# Altium PCB print1.PcbDoc
Units mil, origin at the board's own origin, x right, y up, seen from the top; angles counter-clockwise.
Board outline 2840 x 2960 mil, 2 copper layers (Top Layer, Bottom Layer); 50 components, 40 nets, 154 pads, 55 vias.
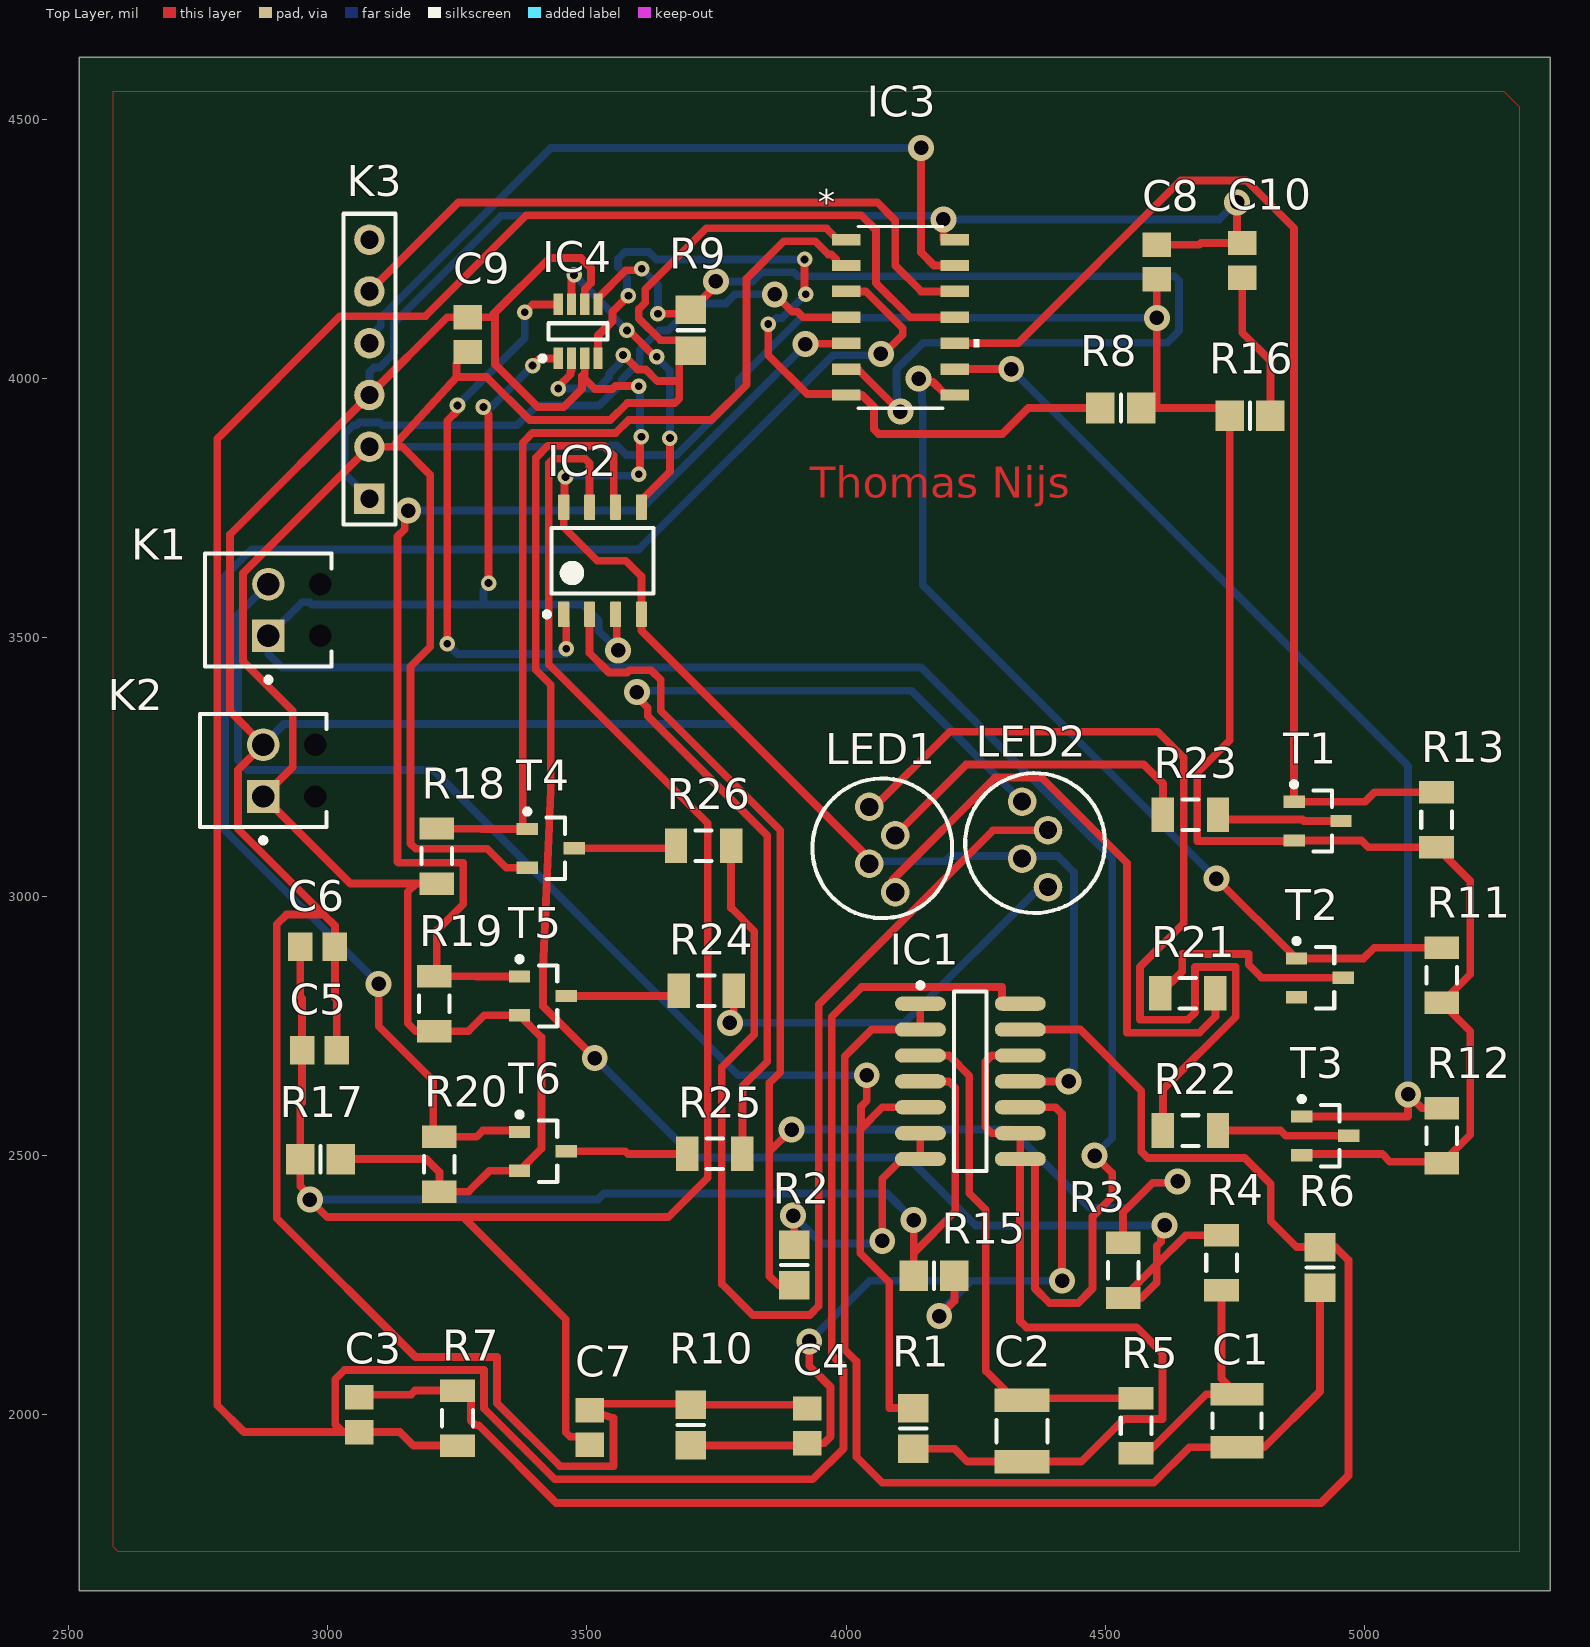
[diagram p0: Top Layer view]
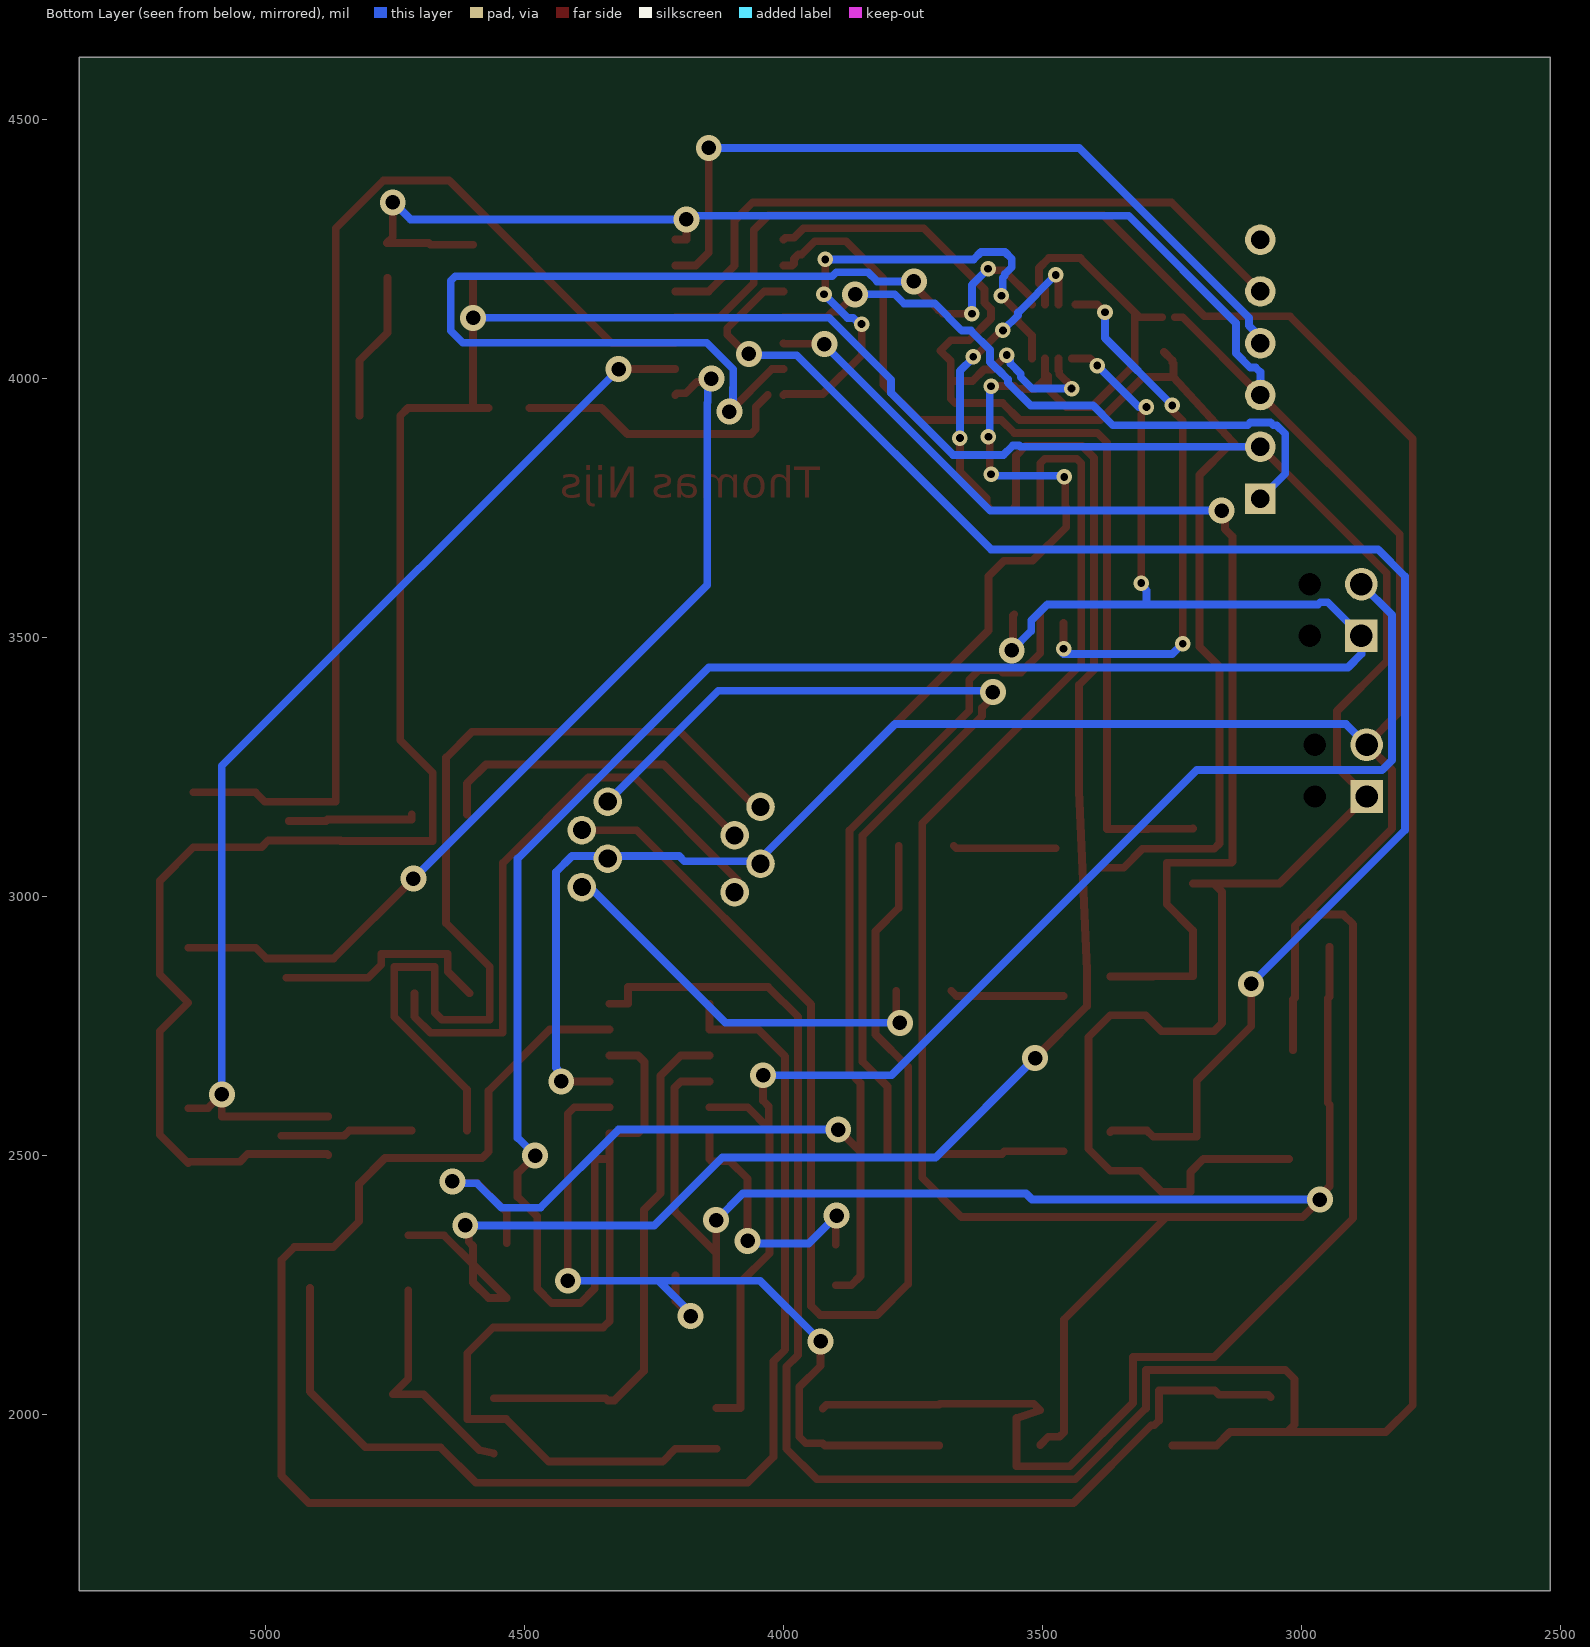
[diagram p1: Bottom Layer view, seen from below]

## Layer stack, top to bottom
Top Solder: solder mask 0.4, Solder Resist, Dk 3.5
Top Layer: signal copper 1.4
Dielectric 1: dielectric 12.6, FR-4, Dk 4.8
Bottom Layer: signal copper 1.4
Bottom Solder: solder mask 0.4, Solder Resist, Dk 3.5

## Board outline
2520,1660 5360,1660 5360,4620 2520,4620

## Design rules (kind name [scope] priority, off if disabled: settings)
Clearance [All] p1: gap=7 ignorepadtopadclearanceinfootprint=FALSE
PolygonConnect [All] p1: connectstyle=Relief reliefconductorwidth=10 reliefentries=4 polygonreliefangle="90 Angle" airgapwidth=10
RoutingVias [All] p1: holewidth=28 width=50 viastyle="Through Hole" minholewidth=28 minwidth=50 maxholewidth=28 maxwidth=50
SolderMaskExpansion [All] p1: expansion=4 istentingtop=FALSE
Width [All] p1: maxlimit=15 minlimit=15 preferedwidth=15 minimp=50.000000 maximp=50.000000 favimp=50.000000
30 further rules are at their usual default settings.

## Classes and differential pairs
component class part2: C1 C2 C3 C4 C5 C6 C7 IC1 IC2 K1 K2 R1 R2 R3 R4 R5 R6 R7 R10 R15 R17
component class part1: C8 C9 C10 IC3 IC4 K3 LED1 LED2 R8 R9 R11 R12 R13 R16 R18 R19 R20 R21 R22 R23 R24 R25 R26 T1 T2 T3 T4 T5 T6

## Components (designator, comment, footprint, x,y, rotation, side; value= is the part's Value field where it differs from the comment)
C1 "1210 10 µF" CAPC3225X279X50LL20T25 4755,1988.15 r270 top
C2 "3.3µF" CAPC1210(3225)280_N 4340,1968.15 r270 top
C3 "150 nF" CAPC2013X70X45NL10T25 3060,1999.69 r90 top
C4 "1 µF" CAPC2013X70X45NL10T25 3925,1978.15 r270 top
C5 "1 µF" CAPC2013X70X45NL10T25 2983.46,2703.15 r180 top
C6 "100 nF" CAPC2013X70X45NL10T25 2980,2903.15 r180 top
C7 "100 nF" CAPC2013X70X45NL10T25 3505,1974.69 r270 top
C8 "100 nF" CAPC2013X70X45NL10T25 4600,4224.69 r270 top
C9 "100 n f" CAPC2013X70X45NL10T25 3270,4084.69 r270 top
C10 "100 nF" CAPC2013X70X45NL10T25 4765,4228.15 r90 top
IC1 "MCP6004-E/SL" SOIC-SL14_M 4240,2643.15 r0 top
IC2 "TLC271ID" D0008A_L 3530,3648.15 r90 top
IC3 "PIC16LF15325-I/SL" SOIC14_SL_MCH 4105,4118.15 r0 top
IC4 "CAT5171TBI-50GT3" ONSC-SOT23-8-527AK-01_N 3482.8,4090.98 r90 top
K1 "1725656" PHOE-1725656-2 2885,3553.15 r90 top
K2 "1725656" PHOE-1725656-2 2875,3243.15 r90 top
K3 "Header 6" HDR1X6 3080,3768.15 r90 top
LED1 "L-154A4SUREQBFZGEW" L-154A4SUREQBFZGEC 4070,3093.15 r0 top
LED2 "L-154A4SUREQBFZGEW" L-154A4SUREQBFZGEC 4365,3103.15 r0 top
R1 "" 6-0805_M 4130,1973.15 r270 top value=15M
R2 "" 6-0805_M 3900,2288.78 r270 top value=10K
R3 "" C1206 4535,2278.15 r270 top value=330K
R4 "" C1206 4725,2293.15 r270 top value=15K
R5 "" C1206 4560,1978.15 r90 top value=15K
R6 "" 6-0805_M 4915,2283.78 r90 top value=10K
R7 "" C1206 3250,1993.15 r270 top value=470K
R8 "" 6-0805_M 4530.63,3943.15 r180 top value=10K
R9 "" 6-0805_M 3700,4093.15 r90 top value=10K
R10 "" 6-0805_M 3700,1979.69 r270 top value=10K
R11 "" C1206 5150,2848.15 r270 top value=470K
R12 "" C1206 5150,2538.15 r270 top value=470K
R13 "" C1206 5140,3148.15 r270 top value=470K
R15 "" 6-0805_M 4170,2268.15 r0 top value=10K
R16 "" 6-0805_M 4780,3928.15 r0 top value=10K
R17 "" 6-0805_M 2985.63,2493.15 r180 top value=10
R18 "" C1206 3210,3078.15 r270 top value=470K
R19 "" C1206 3205,2793.15 r270 top value=470K
R20 "" C1206 3215,2483.15 r270 top value=470K
R21 "" C1206 4660,2813.15 r0 top value=220
R22 "" C1206 4665,2548.15 r180 top value=220
R23 "" C1206 4665,3158.15 r180 top value=220
R24 "" C1206 3730,2818.15 r180 top value=220K
R25 "" C1206 3746.85,2503.15 r180 top value=220K
R26 "" C1206 3725,3098.15 r180 top value=220K
T1 "BSS84P" INF-PG-SOT23_N 4910.28,3145.75 r0 top
T2 "BSS84P" INF-PG-SOT23_N 4915,2843.15 r0 top
T3 "BSS84P" INF-PG-SOT23_N 4925,2538.15 r0 top
T4 "BSS84P" INF-PG-SOT23_N 3430,3093.15 r0 top
T5 "BSS84P" INF-PG-SOT23_N 3415,2808.15 r0 top
T6 "BSS84P" INF-PG-SOT23_N 3415,2508.15 r0 top

## Footprints (in the part's own frame and the unit in brackets; to place one, negate y for a bottom-side part, rotate by r counter-clockwise, add the part's x,y. Pads: shape width x height; smd on the part's side, far side on the other; paste and mask are expansions set on the pad)
6-0805_M [mm] "Chip Resistor, Body 2.0x1.2mm, IPC Low Density"
  rect 1.4x1.5 smd: 1(-1,0) 2(1,0)
  silkscreen extent 0,-0.65 0,0.65, body extent -1.07,-0.7 1.07,0.7, height 0.7
C1206 [mm] "Chip Capacitor, Body 3.2x1.6mm, IPC High Density"
  rect 1.1x1.7 smd: 1(-1.35,0) 2(1.35,0)
  silkscreen extent -0.4,-0.75 0.4,0.75, body extent -1.7,-0.9 1.7,0.9, height 1.3
CAPC1210(3225)280_N [mm] "Chip Capacitor, Body 3.2x2.5mm, Height 2.8mm, IPC Medium Density"
  rect 1.15x2.7 smd: 1(-1.5,0) 2(1.5,0)
  silkscreen extent -0.55,-1.25 0.55,1.25, body extent -1.7,-1.4 1.7,1.4, height 2.8
CAPC2013X70X45NL10T25 [mm] "Chip Capacitor, 2-Leads, Body 2.00x1.25mm, IPC Medium Density"
  rect 1.2x1.4 smd: 1(-0.85,0) 2(0.85,0)
  body extent -1.05,-0.67 1.05,0.67, height 0.7
CAPC3225X279X50LL20T25 [mm] "Chip Capacitor, 2-Leads, Body 3.40x2.70mm, IPC High Density"
  rect 1.1x2.6 smd: 1(-1.3,0) 2(1.3,0)
  silkscreen extent -0.35,-1.2 0.35,1.2, body extent -1.7,-1.35 1.7,1.35, height 2.79
D0008A_L [mm] "SOIC, 8-Leads, Body 5x4mm, Pitch 1.27mm, IPC High Density"
  rrect18% 1.25x0.55 smd: 1(-2.625,1.905) 2(-2.625,0.635) 3(-2.625,-0.635) 4(-2.625,-1.905) 5(2.625,-1.905) 6(2.625,-0.635) 7(2.625,0.635) 8(2.625,1.905)
  silkscreen extent -2.75,-2.5 1.6,2.85, body extent -3,-2.45 3,2.45, height 1.63
HDR1X6 [mm] "Connector; Header; 6 Position"
  rect 1.5x1.5 hole 0.9: 1(0,0)
  round 1.5 hole 0.9: 2(2.54,0) 3(5.08,0) 4(7.62,0) 5(10.16,0) 6(12.7,0)
  silkscreen extent -1.27,-1.27 13.97,1.27
INF-PG-SOT23_N [mm] "SOT23, 3-Leads, Body 2.9x1.3mm, Pitch 0.95mm, IPC Medium Density"
  rect 1.05x0.6 smd: 1(-1.15,0.95) 2(-1.15,-0.95) 3(1.15,0)
  silkscreen extent -1.27,-1.5 0.7,1.92, body extent -0.7,-1.5 0.7,1.5, height 1.1
L-154A4SUREQBFZGEC [mm]
  round 1.4 hole 0.889: 1(0.635,-2.159) 2(-0.635,-0.762) 3(0.635,0.635) 4(-0.635,2.032)
  silkscreen extent -3.43,-3.43 3.43,3.43
ONSC-SOT23-8-527AK-01_N [mm] "SOT23, 8-Leads, Body 2.9x1.6mm, Pitch 0.65mm, IPC Medium Density"
  rect 1.05x0.45 smd: 1(-1.325,0.975) 2(-1.325,0.325) 3(-1.325,-0.325) 4(-1.325,-0.975) 5(1.325,-0.975) 6(1.325,-0.325) 7(1.325,0.325) 8(1.325,0.975)
  silkscreen extent -1.45,-1.45 0.4,1.87, body extent -0.8,-1.45 0.8,1.45, height 1.45
PHOE-1725656-2 [mm] "Connector, 2-Leads, Body 6.2x5.4mm, Pitch 2.54mm"
  rect 1.6x1.6 hole 1.1: 1(-1.27,0)
  round 1.6 hole 1.1: 2(1.27,0)
  round 0 hole 1.1 unplated: MH1(-1.27,-2.54) MH2(1.27,-2.54)
  silkscreen extent -3.54,-3.1 2.77,3.1, body extent -2.77,-3.1 2.77,3.1, height 9
SOIC14_SL_MCH [mil]
  rect 55x22 smd paste+0 mask+0: 1(-104.5,150) 2(-104.5,100) 3(-104.5,50) 4(-104.5,0) 5(-104.5,-50) 6(-104.5,-100) 7(-104.5,-150) 8(104.5,-150) 9(104.5,-100) 10(104.5,-50) 11(104.5,0) 12(104.5,50) 13(104.5,100) 14(104.5,150)
  silkscreen extent -82,-175 152,176, body extent -118,-171 118,171, height 69
SOIC-SL14_M [mm] "SOIC, 14-Leads, Body 8.7x3.9mm, Pitch 1.27mm, IPC Low Density"
  oval 2.5x0.7 smd: 1(-2.45,3.81) 2(-2.45,2.54) 3(-2.45,1.27) 4(-2.45,0) 5(-2.45,-1.27) 6(-2.45,-2.54) 7(-2.45,-3.81) 8(2.45,-3.81) 9(2.45,-2.54) 10(2.45,-1.27) 11(2.45,0) 12(2.45,1.27) 13(2.45,2.54) 14(2.45,3.81)
  silkscreen extent -2.57,-4.4 0.8,4.83, body extent -2,-4.38 2,4.38, height 1.75

## Part data
C1: library part CMP-2000-05477-1, "Chip Capacitor, 10 uF, +/- 10%, 25 V, -55 to 85 degC, 1210 (3225 Metric), RoHS, Tape and Reel", Capacitance=10µF, Manufacturer=AVX, Operating Temperature=-55°C~85°C, Package / Case=1210(3225Metric), Package Description="2-Pin Surface Mount Device, Body 3.2 x 2.5 mm", Package Reference=1210, Ratings=-, Standard Package=1, Temperature Coefficient=X5R, Tolerance=±10%, Voltage - Rated=25V, Applications=GeneralPurpose, Catalog Drawings=AT2A_1210_2.79, Category=Capacitors, Datasheet URL=http://datasheets.avx.com/cx5r.pdf, Datasheet Version=05/2016, Family=CeramicCapacitors, Features=-, Height - Seated (Max)=-, Lead Spacing=-, Lead Style=-, Manufacturer URL=http://www.avx.com/, Mounting Technology=SurfaceMount, Mounting Type=SurfaceMount,MLCC, Online Catalog=X5RDielectric(D), Other Names=478-1627-6, Packaging=Digi-Reel®, Product Training Modules=ComponentSolutionsforSmartMeterApplications, Series=-, Size / Dimension="0.126\"Lx0.098\"W(3.20mmx2.50mm)", Thickness (Max)="0.110\"(2.79mm)"
C2: library part CMP-1038-02104-1, "CAP 2.2uF 100V ±10% 1210 (3225 Metric) Thickness 2.8mm SMD", Case-EIA=1210, Case-Metric=3225, Rated Voltage="100 V", Tolerance=Â±10%, Max Thickness="2.8 mm", Technology=SMT
C3 C4 C5 C6 C7 C8 C9 C10: library part CMP-2007-00889-1, Manufacturer=Murata, Part Number=GRM2165C1H332JA01D
IC1: library part CMP-0187-00279-2, "1 MHz, Low-Power Operational Amplifier, 14-Pin SOIC, Extended Temperature", Code_IPC=SOIC127P600-14, Code_JEDEC=MS-012-AB, ComponentLink1Description="Manufacturer URL", ComponentLink1URL=http://www.microchip.com/, ComponentLink2Description=Datasheet, ComponentLink2URL=http://ww1.microchip.com/downloads/en/DeviceDoc/21733j.pdf, ComponentLink3Description="Package Specification", ComponentLink3URL=http://www.microchip.com/stellent/groups/techpub_sg/documents/packagingspec/en012702.pdf, DatasheetVersion="revJ, Nov-2009", PackageDescription="14-Lead Plastic Small Outline (SL) - Narrow, 3.90mm Body [SOIC]", PackageReference=SOIC-SL14, PackageVersion="revBB, Aug-2009", RevisionNote="URLs added."
IC2: library part CMP-0017-00249-2, "LinCMOS(TM) Programmable Low-Power Operational Amplifier, 4 to 16 V, -40 to 85 degC, 8-pin SOIC (D8), Green (RoHS & no Sb/Br)", Manufacturer="Texas Instruments", Rating=Military, Total Supply Voltage(Max)(+5V is 5, +/-5V is 10)=16, Total Supply Voltage(Min)(+5V is 5, +/-5V is 10)=4, CMRR(Min)(dB)=65, Code_JEDEC=MS-012, ComponentLink1Description="Manufacturer URL", ComponentLink1URL=http://www.ti.com/, ComponentLink2Description=Datasheet, ComponentLink2URL=http://www.ti.com/lit/ds/symlink/tlc271.pdf, ComponentLink3Description="Package Specification", ComponentLink3URL=http://www.ti.com/litv/pdf/msoi002j, DatasheetVersion=SLOS090D, Eco-Plan="Green (RoHS & no Sb/Br)", GBW(Typ)(MHz)=1.7, IIB(Max)(pA)=60, Iq per channel(Max)(mA)=1.6, Mounting Technology="Surface Mount", Number of Channels=1, Offset Drift(Typ)(uV/C)=1.8, PackageDescription="8-Pin Plastic Small Outline, Body 4.9 x 3.9 mm, Pitch 1.27 mm", PackageReference=D0008A, PackageVersion="4040047-3/M, 06/2011", PartNumber=TLC271ID, Slew Rate(Typ)(V/us)=3.6, Sub Family="General Purpose Amplifier", Vio (25C)(Max)(mV)=10, Vn at 1kHz(Typ)(nV/rtHz)=25
IC3: "No Description Available", Built_By=EMA_Cory, Copyright="Copyright (C) 2018 Accelerated Designs. All rights reserved", Datasheet=http://ww1.microchip.com/downloads/en/DeviceDoc/PIC16-L-F15325-45-Data-Sheet-40001865D.pdf, Manufacturer_Part_Number=PIC16LF15325-I/SL, RefDes=RefDes, SourceLibrary=Microchip_2020-03-04, Type=DEV, Vendor=Microchip
IC4: library part CMP-1317-00202-1, "256-Position I2C Compatible Digital Potentiometer (POT), -40 to 85 degC, 8-Pin SOT23, Pb-Free, Tape and Reel", Manufacturer="On Semiconductor", # of Pots=1, # of Taps=256, Code_JEDEC=MO-178, ComponentLink1Description="Manufacturer URL", ComponentLink1URL=http://www.onsemi.com/, ComponentLink2Description=Datasheet, ComponentLink2URL=http://www.onsemi.com/pub_link/Collateral/CAT5171-D.PDF, ComponentLink3Description="Package Specification", ComponentLink3URL=http://www.onsemi.com/pub_link/Collateral/527AK.PDF, Control Interface=I2C, DatasheetVersion="Rev. 2", Mounting Technology="Surface Mount", PackageDescription="8-Pin Small Outline Transistor, Body 2.9 x 1.6 mm, Pitch 0.65 mm", PackageReference=SOT23-8-527AK-01, PackageVersion="Rev. A, 03/2009", Packing="Tape and Reel", PartNumber=CAT5171TBI-50GT3, RoHS=TRUE, Type=Potentiometer, VDD Max (V)=5.5
K1 K2: library part CMP-2000-05299-1, "Male Header, Pitch 2.54 mm, 1 x 2 Position, Height 9 mm, Tail Length 3.5 mm", Colour=Green, Manufacturer="Phoenix Contact", Content=250pc(s), Datasheet URL=http://datasheet.octopart.com/1725656-Phoenix-Contact-datasheet-5302866.pdf, Datasheet Version=Apr-08, Industrial packaging=Yes, Manufacturer part No.=1725656, Manufacturer URL=http://www.phoenixcontact.com/, Number of contacts=2, Pitch=2.54mm, Type=MPT0,5/2-2,54
K3: "Header, 6-Pin", LatestRevisionDate=17-Jul-2002, LatestRevisionNote="Re-released for DXP Platform.", Publisher="Altium Limited"
LED1 LED2: "LED", Manufacturer_Name=Kingbright, Mouser Part Number=N/A, Datasheet Link=http://www.kingbright.com/attachments/file/psearch/000/00/00/L-154A4SUREQBFZGEW(Ver.11A).pdf, Manufacturer_Part_Number=L-154A4SUREQBFZGEW, Mouser Price/Stock=https://www.mouser.co.uk/ProductDetail/Kingbright/L-154A4SUREQBFZGEW?qs=2JU0tDl2GZ3s0DU5fkfHGQ%3D%3D
R1 R2 R3 R4 R5 R6 R7 R8 R9 R10 R11 R12 R13 R15 R16 R17 R18 R19 R20 R21 R22 R23 R24 R25 R26: library part Res1, "Resistor", LatestRevisionDate=17-Jul-2002, LatestRevisionNote="Re-released for DXP Platform.", PackageDescription="Axial Device, Thru-Hole; 2 Leads; 0.3 in Pin Spacing", PackageReference=AXIAL-0.3, Published=8-Jun-2000, Publisher="Altium Limited", Supplier 1=RSComponents
T1 T2 T3 T4 T5 T6: library part CMP-1099-00028-1, "P-Channel SIPMOS Small-Signal-Transistor, -60 V VDS, -0.17 A ID, -55 to 150 degC, PG-SOT23, Reel, Green", Manufacturer=Infineon, ComponentLink1Description="Manufacturer URL", ComponentLink1URL=http://www.infineon.com/, ComponentLink2Description=Datasheet, ComponentLink2URL=http://www.infineon.com/dgdl/BSS84P_Rev2.7%5B1%5D.pdf?folderId=db3a304314dca38901154a72e3951a65&fileId=db3a304330f68606013118ac7a9b4549, ComponentLink3Description="Package Specification", ComponentLink3URL=http://www.infineon.com/dgdl/SOT23-Package_Overview.pdf?folderId=db3a30431936bc4b0119532290053c66&fileId=db3a30431936bc4b0119533468123c85, DatasheetVersion="Rev. 2.7", Green=TRUE, Halogen-free=TRUE, ID (max)="-0.17Â A", IDpuls (max)="-0.68Â A", Mounting Technology="Surface Mount", PackageDescription="3-Pin Small Outline Transistor Package, 2.9 x 1.3 mm Body, 0.95 mm Pitch", PackageReference=PG-SOT23, PackageVersion=Apr-08, Packing=Reel, PartNumber=BSS84P, Pto t (max)="0.36Â W", QG="1Â nC", RDS (on) (max)="8,000Â mOhm", RDS (on) (max) (@4.5V)="12,000Â mOhm", Rth="350Â K/W", VDS (max)="-60Â V", VGS(th) (max)="-2Â V", VGS(th) (min)="-1Â V"

## Via types
v1: diameter 50, hole 28, Top Layer to Bottom Layer, 32 vias
v2: diameter 30, hole 15, Top Layer to Bottom Layer, 23 vias

## Nets (pads, with @x,y where several pads share a name; then routed paths per layer and width w, separated by ;. In a path a pad name is that pad's centre, name@x,y a point inside that pad or via, vN(x,y) a via of type N, cw(c..) or ccw(c..) an arc to the next point about the centre after c; other vN are vias at no path point)
+5: C8.2 C9.2 IC3.1 IC4.2 K2.1 K3.2 R8.1 R9.1 R11.2 R12.2 R13.2 R16.1 R17.1 R18.2 R19.2 R20.2 T1.2 T3.2 T4.2 T5.2 T6.2 | length 9801.8
  Top Layer w15: R17.1 3190,2493.15 3215,2468.15 R20.2 3271,2430 3311.75,2470.75 T6.2 3412,2513.02 3412,2728.47 T5.2 3301.75,2770.75 3271,2740 3169.65,2740 3154,2755.65 3154,3009 3170,3025 ; R18.2 3170,3025 ; 3248.22,4002.76 3306.62,4002.76 3389.38,3920 3545,3920 3577.5,3952.5 3669.19,3952.5 3677.97,3961.29 3677.97,3997.5 ; C9.2@3266.06,4051.22 3249.94,4035.1 3249.94,4031.16 3247.98,4029.2 3247.98,4002.52 3125.22,3868.15 ; T4.2 3344,3055.75 3307.6,3092.14 3169.29,3092.14 3159.04,3102.4 3159.04,3443.79 3197.5,3482.26 3197.5,3813.65 3143,3868.15 3125.22,3868.15 ; v2(3444.52,3980.48) 3444.52,3984.54 3468.3,4008.32 3468.3,4013.82 3470,4015.52 IC4.2 ; v2(3569.54,4045.35) 3569.79,4045.35 3597.64,4017.5 3613.46,4017.5 3635.96,3995 3675.47,3995 3677.97,3997.5 ; IC3.1 3997,4271.65 3980.5,4271.65 3962.15,4290 3730,4290 3612.5,4172.5 3612.5,4146.54 3600,4134.04 3600,4115.96 3642.12,4073.84 3677.97,4073.84 3698.03,4053.78 3677.97,4033.72 3677.97,3997.5 ; R8.1 4600,3943.15 ; C8.2 v1(4600,4117.15) 4600,3943.15 ; T3.2 4882.13,2503.15 5035,2503.15 5050,2488.15 5146.85,2488.15 R12.2 5205,2540 5205,2740 R11.2 5205,2850 5205,3030 R13.2 5008.35,3095 4995,3108.35 4856,3108.35 4856,3107.15 4678,3107.15 4678,3239.15 4740.63,3301.78 R16.1 4725.63,3943.15 4600,3943.15 ; 3125.22,3868.15 K3.2 2836,3624.15 2836,3454.15 2932,3358.15 2932,3250.15 K2.1 3043.15,3025 3170,3025
  Bottom Layer w15: K3.2 3543.15,3868.15 3545.5,3870.5 3557.92,3870.5 3575.92,3852.5 3673.46,3852.5 3792.98,3972.02 3792.98,3997.63 3912.51,4117.15 v1(4600,4117.15) ; v2(3444.52,3980.48) 3520.48,3980.48 3542.5,4002.5 3542.5,4008.82 3562.89,4029.21 3562.89,4034.64 3569.54,4041.29 v2(3569.54,4045.35)
GND: C4.1 C5.1 C6.1 C7.1 C8.1 C9.1 C10.2 IC1.11 IC2.4 IC2.8 IC3.14 IC4.3 IC4.6 K2.2 K3.3 LED1.2 LED2.2 R10.1 | length 10482.3
  Top Layer w15: C5.1 3016.93,2801.15 3013.46,2804.62 3013.46,2943.69 2992,2965.15 ; C9.1@3245,4118.15 3230,4118.15 K3.3 2811,3699.15 2811,3357.15 K2.2 2826,3244.15 2826,3131.15 2992,2965.15 ; C9.1 3313.15,4118.15 3322.5,4127.5 ; v2(3458.5,3810) 3456.75,3808.25 3456.75,3753.25 IC2.8 3455,3713.15 3520,3648.15 3575,3648.15 3605,3618.15 3605,3513.47 LED1.2@4050.32,3068.15 ; 3490.3,4004.7 3490.3,3980.3 3455,3945 3405,3945 3322.5,4027.5 3322.5,4127.5 ; IC4.3 3495.59,4010 3495.59,3999.41 3515,3980 3549.23,3980 3555,3985.77 3599.23,3985.77 v2(3600,3985) ; IC4.6 3495.59,4171.84 3507.5,4183.75 3507.5,4213.46 3488.46,4232.5 3427.5,4232.5 3322.5,4127.5 ; v2(3600,3815) 3602.5,3817.5 3602.5,3885 v2(3605,3887.5) ; C4.1 3917.56,2019.06 R10.1 3698.44,2020.62 3517.47,2020.62 C7.1 3551,1993.15 3551,1900.1 3448.05,1900.1 3326,2022.15 3326,2111.15 3169,2111.15 2901,2379.15 2901,2946.15 2920,2965.15 2992,2965.15 ; v1(4188,4307.15) 4188,4268.15 IC3.14 ; IC1.11 v1(4429.75,2643.15) ; C8.1 4682,4258.15 4685.46,4261.61 4766,4261.61 4755,4272.61 v1(4755,4340)
  Bottom Layer w15: K2.2 2915,3333.15 3785.32,3333.15 4050.32,3068.15 4192,3068.15 4202,3078.15 4409,3078.15 4440,3047.15 4440,2669.44 4436.44,2665.88 4436.44,2649.85 v1(4429.75,2643.15) ; K3.3 3080,4012.34 3088.79,4021.12 3099.48,4021.12 3127.03,4048.67 3127.03,4107.03 3334.15,4314.15 v1@4188,4314.15 ; v2(3458.5,3810) 3461,3812.5 3597.5,3812.5 v2(3600,3815) ; v2(3600,3985) 3602.5,3982.5 3602.5,3890 v2(3605,3887.5) ; v1(4188,4307.15) 4720.67,4307.15 4753.52,4340 v1(4755,4340)
NetC1_1: C1.1 R4.2 R5.1 | length 453.6
  Top Layer w15: R5.1 4585.96,1931.09 4587.44,1931.09 4695.68,2039.33 C1.1 4725,2069.33 R4.2
NetC1_2: C1.2 IC1.1 IC1.2 R6.1 | length 2188.5
  Top Layer w15: IC1.1 IC1.2 4049.56,2743.15 3997.5,2691.09 3997.5,2125.3 4020.06,2102.74 4020.06,1918.15 4070.06,1868.15 4594.18,1868.15 4663,1936.97 C1.2 4807.5,1936.97 4915,2044.47 R6.1
NetC2_1: C2.1 IC1.3 R5.2 | length 1009.1
  Top Layer w15: IC1.3 4199,2693.15 4238,2654.15 4238,2427.15 4270,2395.15 4270,2084.21 4327,2027.21 C2.1 4344.09,2031.3 R5.2
NetC3_1: C3.1 IC1.14 IC3.11 R7.2 | length 6619.8
  Top Layer w15: R7.2 3165,1940 3138.78,1966.22 C3.1 3028.43,1966.22 ; IC3.11 4124,4118.15 4058,4184.15 4058,4286.65 4029.65,4315 3382.85,4315 3188,4120.15 3023,4120.15 2786,3883.15 2786,2018.15 2837.93,1966.22 3028.43,1966.22 ; IC1.14 4301,2793.15 4301,2825.15 4030,2825.15 3972.5,2767.65 3972.5,2114.94 3995.06,2092.38 3995.06,1934.21 3935.95,1875.1 3437.7,1875.1 3301,2011.79 3301,2086.15 3032,2086.15 3014,2068.15 3014,1980.65 3028.43,1966.22
NetC3_2: C3.2 IC1.13 R6.2 R7.1 | length 3406.4
  Top Layer w15: C3.2 3065,2038.15 3160,2038.15 3168.15,2046.3 R7.1 3276,2046.3 3276,1987.94 3284.79,1979.15 3290.71,1979.15 3440.72,1829.15 4917,1829.15 4970,1882.15 4970,2298.15 4945,2323.15 R6.2 4870,2323.15 4820,2373.15 4820,2445.15 4770,2495.15 4582.5,2495.15 4570,2507.65 4570,2625.15 4452,2743.15 IC1.13
NetC4_2: C4.2 IC1.10 R10.2 R15.2 | length 1606.8
  Top Layer w15: R10.2 3920.63,1940.32 C4.2 3957.5,1944.69 3970.06,1957.25 3970.06,2053.15 3929,2094.21 v1(3929,2141.15) ; v1(4180,2190) 4209.37,2219.37 R15.2 ; IC1.10 4404.5,2593.15 4417,2580.65 v1(4417,2258.15)
  Bottom Layer w15: v1(3929,2141.15) 4046,2258.15 4242,2258.15 ; v1(4180,2190) 4180,2196.15 4242,2258.15 ; v1(4417,2258.15) 4242,2258.15
NetC10_1: C10.1 R16.2 | length 289.1
  Top Layer w15: C10.1 4765,4088.52 4819.37,4034.15 R16.2
NetIC1_5: IC1.5 K1.2 R1.1 | length 2679
  Top Layer w15: v1(4040,2655) 4040,2605.58 4029.12,2594.7 4029.12,2552.27 ; R1.1 4083.63,2012.52 4083.63,2255.3 4027.5,2311.43 4027.5,2550.65 4029.12,2552.27 ; IC1.5 4070,2593.15 4029.12,2552.27
  Bottom Layer w15: K1.2 2826,3544.15 2826,3263.15 2845,3244.15 3203,3244.15 3792.15,2655 v1(4040,2655)
NetIC1_6: IC1.6 IC1.7 R2.1 | length 512.6
  Top Layer w15: v1(3898,2384.15) 3900,2382.15 R2.1 ; v1(4070,2335) 4070,2455.04 4104.01,2489.05 4139.44,2489.05 IC1.7 IC1.6
  Bottom Layer w15: v1(3898,2384.15) 3952,2330.15 4065.15,2330.15 v1(4070,2335)
NetIC2_1: IC2.1 IC4.8 | length 1083.5
  Top Layer w15: v2(3230,3488.15) 3230,3918.15 3250,3938.15 v2(3250,3948.15) ; v2(3380,4128.15) 3395,4143.15 IC4.8@3436.85,4143.15 ; IC2.1@3460,3528.15 3460,3498.15 ; 3460,3498.15 v2(3460,3478.15) 3460,3498.15
  Bottom Layer w15: v2(3230,3488.15) 3250,3468.15 3460,3468.15 v2(3460,3478.15) ; v2(3250,3948.15) 3380,4078.15 v2(3380,4128.15)
NetIC2_2: IC2.2 R2.2 R3.1 | length 2625.8
  Top Layer w15: IC2.2 3505,3469.9 3542.4,3432.5 3577.6,3432.5 3582.05,3436.94 3623.43,3436.94 3642.22,3418.15 3642.22,3358.93 3873,3128.15 3873,2660.78 3852,2639.78 3852,2507.15 ; v1(3895,2550.15) 3852,2507.15 ; R2.2 3870,2249.41 3852,2267.41 3852,2507.15 ; R3.1 4535,2390.15 4592.5,2447.65 4637.65,2447.65 v1(4640,2450)
  Bottom Layer w15: v1(3895,2550.15) 4319,2550.15 4470,2399.15 4545,2399.15 4592.5,2446.65 4636.65,2446.65 v1(4640,2450)
NetIC2_5: IC2.5 IC4.7 | length 610.8
  Top Layer w15: IC4.7 3470,4190.94 3475,4195.94 v2(3475,4200) ; v2(3577.07,4092.93) 3580.46,4092.93 3631.15,4042.24 v2(3634.54,4042.24) ; IC2.5 3608.33,3754.82 3608.33,3768.6 3660,3820.28 v2(3660,3885)
  Bottom Layer w15: v2(3475,4200) 3547.75,4127.25 3547.75,4122.25 v2(3577.07,4092.93) ; v2(3634.54,4042.24) 3634.54,4040.12 3660,4014.66 v2(3660,3885)
NetIC2_6: IC2.6 R3.2 R4.1 | length 3149.2
  Top Layer w15: v1(3515,2688.15) 3415,2788.15 3415,2857.15 3429.99,3204.83 3430,3205.47 3430,3408.79 3401,3437.79 3401,3846.57 3424.43,3870 3532.89,3870 3551.67,3851.21 3551.67,3754.82 IC2.6 ; v1(4615,2365) 4608.3,2358.3 4608.3,2333.66 4600,2325.36 4600,2290 ; R4.1 4656.3,2346.3 4600,2290 ; 4600,2290 4600,2255 4570,2225 R3.2 4600,2290
  Bottom Layer w15: v1(3515,2688.15) 3707,2496.15 4119,2496.15 4250.15,2365 v1(4615,2365)
NetIC3_2: IC3.2 R18.1 T4.1 | length 1842
  Top Layer w15: R18.1 3296.75,3130.55 3376,3130.55 3376,3876.21 3394.79,3895 3555.36,3895 3580.36,3920 3739.85,3920 3808.11,3988.26 3808.11,4193.15 3879.96,4265 3940.4,4265 3965.75,4239.65 3971.71,4239.65 3980.5,4230.86 3980.5,4221.65 3984,4218.15 IC3.2
NetIC3_3: IC3.3 R20.1 T6.1 | length 3073.4
  Top Layer w15: v1(3097.8,2831.35) 3097.8,2749.35 3203,2644.15 3203,2536.3 R20.1 3287,2536.3 3298.85,2548.15 3367.13,2548.15 T6.1 ; IC3.3 4038,4168.15 4109.36,4096.79 4109.36,4084.36 4072.6,4047.6 v1(4067.39,4047.6)
  Bottom Layer w15: v1(3097.8,2831.35) 2801,3128.15 2801,3618.15 2853,3670.15 3600.15,3670.15 3975,4045 4064.79,4045 v1(4067.39,4047.6)
NetIC3_4: IC3.4 K3.1 | length 1265.3
  Top Layer w15: v1(3862.4,4162.5) 3896.16,4128.74 3906.41,4128.74 3917,4118.15 IC3.4
  Bottom Layer w15: K3.1 3032,3816.15 3032,3893.15 3048.85,3910 3055.34,3910 3060.52,3915.18 3099.48,3915.18 3104.66,3910 3365,3910 3402.98,3947.98 3523.34,3947.98 3567.5,3992.14 3567.5,3998.46 3586.54,4017.5 3587.65,4017.5 3602.04,4031.89 3602.04,4055.7 3638.85,4092.5 3656.22,4092.5 3708.72,4145 3768.22,4145 3785.72,4162.5 v1(3862.4,4162.5)
NetIC3_5: IC3.5 R19.1 T5.1 | length 2194.2
  Top Layer w15: v1(3155,3745) 3148.3,3738.3 3148.3,3709.27 3134.03,3695 3134.03,3067.14 3136.03,3065.15 3261,3065.15 3261,2985.15 3210,2934.15 3210,2846.3 3286,2846.3 3286.75,2845.55 T5.1 ; v1(3921.8,4066.35) 3922.71,4067.25 3999.6,4067.25 IC3.5
  Bottom Layer w15: v1(3155,3745) 3601.32,3745 3921.8,4065.49 v1(3921.8,4066.35)
NetIC3_6: IC3.6 IC4.5 R9.2 | length 2166.2
  Top Layer w15: IC4.5 3522.54,4144.51 3522.54,4156.32 3575.13,4208.91 3602.95,4208.91 v2(3605.82,4211.78) ; v2(3636.88,4125.05) 3692.53,4125.05 R9.2 3701.97,4132.52 3749,4179.55 v1(3749,4187.5) ; IC3.6 4023,4018.15 v1(4105,3936.15)
  Bottom Layer w15: v2(3605.82,4211.78) 3636.88,4180.71 v2(3636.88,4125.05) ; v1(3749,4187.5) 3820,4187.5 3837.5,4205 3899.04,4205 3906.54,4197.5 4634.21,4197.5 4643,4188.71 4643,4092.15 4620,4069.15 4149.05,4069.15 4097.5,4017.6 4097.5,3982.4 4098.3,3981.59 4098.3,3942.85 v1(4105,3936.15)
NetIC3_7: IC3.7 IC4.4 R8.2 | length 1544.8
  Top Layer w15: IC4.4 3521.18,4083.01 3549.16,4110.98 3549.16,4129.16 v2(3580,4160) ; v2(3850,4105) 3849.77,4104.77 3849.77,4045.23 3925,3970 3998.65,3970 IC3.7 ; v2(3920,4230) 3920,4165 v2(3922.5,4162.5) v2@3925,4160 ; 4031,3968.15 4054.06,3945.09 4054.06,3901.87 4063,3892.93 4301.78,3892.93 4352,3943.15 R8.2
  Bottom Layer w15: v2(3580,4160) 3577.39,4162.61 3577.39,4194.24 3573.32,4198.32 3573.32,4201.58 3560,4214.89 3560,4231.21 3573.06,4244.28 3619.28,4244.28 3633.56,4230 v2(3920,4230) ; v2(3850,4105) 3854.06,4105 3866.05,4116.99 3876.99,4116.99 v2(3922.5,4162.5)
NetIC3_8: IC3.8 R11.1 T2.1 | length 1793.7
  Top Layer w15: v1(4140,4000) 4146.7,3993.3 4167.85,3993.3 4189.5,3971.65 4206,3971.65 IC3.8 ; v1(4715,3034.47) 4868.92,2880.55 T2.1 4999,2880.55 5019.75,2901.3 R11.1
  Bottom Layer w15: v1(4140,4000) 4146.7,3993.3 4146.7,3954.56 4148,3953.25 4148,3601.47 v1(4715,3034.47)
NetIC3_9: IC3.9 R12.1 T3.1 | length 2150.8
  Top Layer w15: IC3.9 v1(4319,4018.15) ; T3.1 5085,2575.55 v1(5085,2618.15) 5111.85,2591.3 R12.1
  Bottom Layer w15: v1(4319,4018.15) 5085,3252.15 v1(5085,2618.15)
NetIC3_10: IC3.10 R13.1 T1.1 | length 2213.5
  Top Layer w15: IC3.10 4332,4068.15 4646.35,4382.5 4772.6,4382.5 4865,4290.1 T1.1 5002,3183.15 5020.15,3201.3 R13.1
NetIC3_12: IC3.12 K3.5 | length 1322.8
  Top Layer w15: K3.5 3251.85,4340 4060.15,4340 4095,4305.15 4095,4218.15 4145,4168.15 IC3.12
NetIC3_13: IC3.13 K3.4 | length 1514
  Top Layer w15: v1(4145,4445.15) 4145,4243.15 4170,4218.15 IC3.13
  Bottom Layer w15: K3.4 3080,4080.07 3102.03,4102.1 3102.03,4117.38 3429.79,4445.15 v1(4145,4445.15)
NetLED1_1: LED1.1 R21.2 | length 1172.9
  Top Layer w15: LED1.1@4089.69,3018.15 4089.69,3031.9 4287.79,3230 4377.15,3230 4542.69,3064.46 4542.69,2737.18 4682.18,2737.18 4713.15,2768.15 R21.2@4713.15,2813.15
NetLED1_3: LED1.3 R23.2 | length 648.8
  Top Layer w15: LED1.3 4231.85,3255 4575,3255 4611.85,3218.15 R23.2@4611.85,3158.15
NetLED1_4: LED1.4 R22.2 | length 1877.9
  Top Layer w15: LED1.4@4050.32,3168.15 4200.32,3318.15 4602,3318.15 4652,3268.15 4652,2948.46 4567.69,2864.15 4567.69,2762.18 4660.03,2762.18 4673.99,2776.15 4673.99,2864.12 4752.31,2864.12 4752.31,2768.15 4611.85,2627.69 R22.2@4611.85,2548.15
NetLED2_1: LED2.1 R24.1 | length 786.3
  Top Layer w15: v1(3776,2756.15) 3783.15,2763.3 R24.1@3783.15,2818.15
  Bottom Layer w15: v1(3776,2756.15) 4112.69,2756.15 LED2.1@4384.69,3028.15
NetLED2_3: LED2.3 R26.1 | length 2268.8
  Top Layer w15: R26.1@3778.15,3098.15 3778.15,2978 3823,2933.15 3823,2733.74 3760,2670.74 3760,2252.15 3820,2192.15 3930,2192.15 3947.5,2209.65 3947.5,2791.65 4284,3128.15 LED2.3@4384.69,3128.15
NetLED2_4: LED2.4 R25.1 | length 1856
  Top Layer w15: v1(3596.52,3394.44) 3596.52,3385.33 3617.22,3364.63 3617.22,3348.57 3848,3117.79 3848,2681.15 3800,2633.15 R25.1
  Bottom Layer w15: v1(3596.52,3394.44) 3599.23,3397.15 4126.32,3397.15 LED2.4@4345.32,3178.15
NetR21_1: R21.1 T2.3 | length 436
  Top Layer w15: R21.1@4606.85,2813.15 4648.99,2855.29 4648.99,2889.12 4777.31,2889.12 4777.31,2868.15 4802.31,2843.15 T2.3
NetR22_1: R22.1 T3.3 | length 256.3
  Top Layer w15: R22.1@4718.15,2548.15 4839,2548.15 4849,2538.15 T3.3
NetR23_1: R23.1 T1.3 | length 248.2
  Top Layer w15: R23.1@4718.15,3158.15 4718.15,3148.47 4881.14,3148.47 4883.87,3145.75 T1.3
NetR24_2: R24.2 T5.3 | length 220.7
  Top Layer w15: T5.3 3666.85,2808.15 R24.2@3676.85,2818.15
NetR25_2: R25.2 T6.3 | length 235.5
  Top Layer w15: T6.3 3574,2508.15 3579,2503.15 R25.2
NetR26_2: R26.2 T4.3 | length 198.6
  Top Layer w15: T4.3 3666.85,3093.15 R26.2@3671.85,3098.15
VCC: C5.2 C6.2 C7.2 IC1.4 IC2.7 R15.1 R17.2 | length 5266.5
  Top Layer w15: C6.2 2946.54,2806.61 2950,2803.15 C5.2 2950,2601.89 2946.26,2598.15 2946.26,2441.12 2965,2422.38 v1(2965,2415) 2998.85,2381.15 3261.49,2381.15 ; C7.2 3489.21,1957.01 3467.79,1957.01 3459,1965.8 3459,2183.64 3261.49,2381.15 ; IC2.7 3505,3836.21 3496.21,3845 3434.79,3845 3426,3836.21 3426,3448.15 3733,3141.15 3733,2457.15 3657,2381.15 3261.49,2381.15 ; R15.1 4130.63,2311.78 ; v1(4130.63,2375.15) 4130.63,2311.78 ; IC1.4 4198.5,2643.15 4211,2630.65 4211,2392.15 4130.63,2311.78
  Bottom Layer w15: v1(2965,2415) 3520.98,2415 3532.63,2426.65 4079.13,2426.65 v1(4130.63,2375.15)
VCC/2: C2.2 IC1.8 IC1.9 IC1.12 IC2.3 IC4.1 K1.1 R1.2 | length 6097.2
  Top Layer w15: v2(3300,3945) 3300,3940.94 3310,3930.94 v2(3310,3605) ; v2(3395,4025) 3408.82,4038.82 IC4.1 ; IC2.3 3557.5,3542.3 3557.5,3477.5 v1(3560,3475) ; R1.2 4209.37,1933.78 4234.06,1909.09 4454,1909.09 4536.06,1991.15 4610.97,1991.15 4610.97,2118.15 4560.97,2168.15 4348.5,2168.15 4336,2180.65 4336,2493.15 IC1.8 ; IC1.12 4281.5,2693.15 4269,2680.65 4269,2555.65 4281.5,2543.15 IC1.9 IC1.8 ; v1(4480,2500) 4514,2466 4514,2420.15 4476,2382.15 4476,2243.15 4448,2215.15 4393,2215.15 4365,2243.15 4365,2493.15 IC1.8
  Bottom Layer w15: v2(3300,3945) 3315,3945 v2(3395,4025) ; v2(3310,3605) 3310,3600.94 3300,3590.94 3300,3564 ; v1(3560,3475) 3522.15,3512.85 3522.15,3532.85 3491,3564 3300,3564 ; v1(4480,2500) 4514,2534 4514,3073.19 4145.04,3442.15 2911,3442.15 2885,3468.15 K1.1 2950,3568.15 2964.63,3568.15 2968.78,3564 3300,3564
pads on no net: K1.MH1 K1.MH2 K2.MH1 K2.MH2 K3.6 T2.2

## Polygon pours and split planes (outlines as drawn)
GND on Top Layer "NONET_L01_P000" (solid, shelved, pour order 0): 2585,4555 5270,4555 5300,4525 5300,1735 2595,1735 2585,1745

## Other copper
Top Layer:
  text "Thomas Nijs" at 3930,3769.99 h60

## Silkscreen, mask and mechanical layers (free items; w line width, h text height)
Boardoutline:
  the board outline again, w10

## Text inside footprints (layer, text, board x,y; h text height)
IC3: Top Overlay "*" at 3945,4315 h50; Mechanical 13 "*" at 4030.5,4235.65 h50; Mechanical 7 "0.05in/1.27mm" at 3926.25,3827.65 h25; Mechanical 7 "0.05in/1.27mm" at 3718,4230.65 h25; Mechanical 7 "0.341in/8.661mm" at 4302,4105.65 h25; Mechanical 7 "0.236in/5.994mm" at 4011.25,4458.65 h25; Mechanical 7 "0.154in/3.912mm" at 4011.25,4383.65 h25; Mechanical 7 "Alt 2 Padstyle: OX90Y60D30P" at 3767.5,3447.65 h50; Mechanical 7 "Alt 1 Padstyle: OX60Y90D30P" at 3767.5,3507.65 h50; Mechanical 7 "Pin One Padstyle: RX55Y22D0T" at 3755,3687.65 h50; Mechanical 7 "Default Padstyle: RX55Y22D0T" at 3755,3747.65 h50